# Allegro board PR1.brd
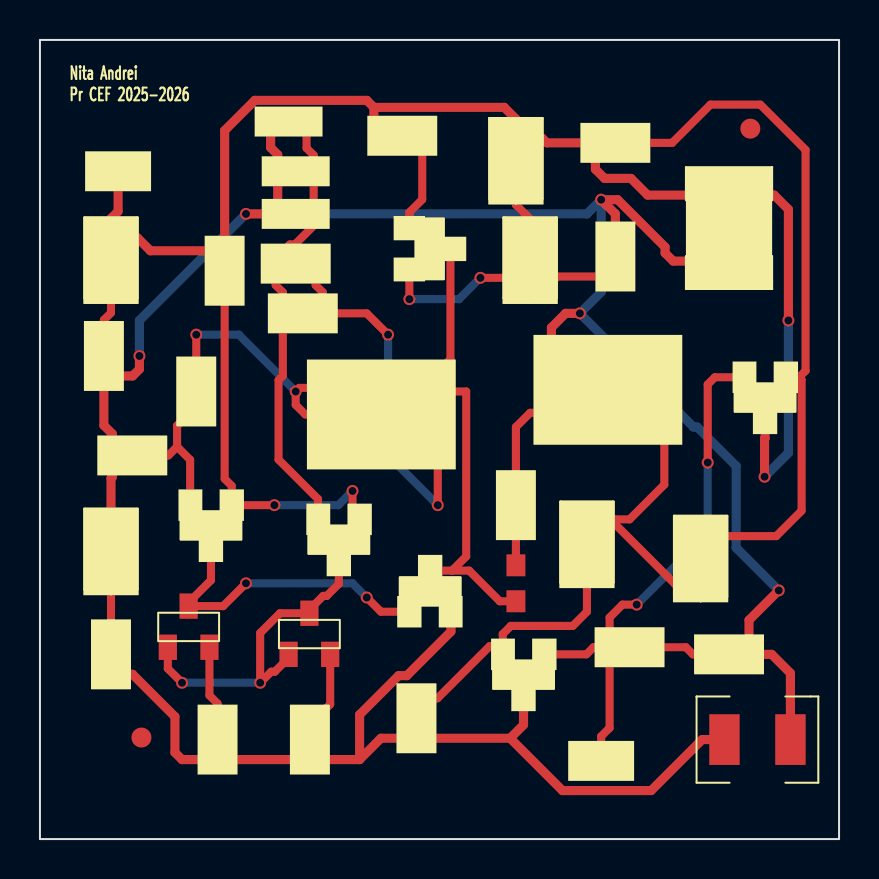
[diagram p0: board, top side]
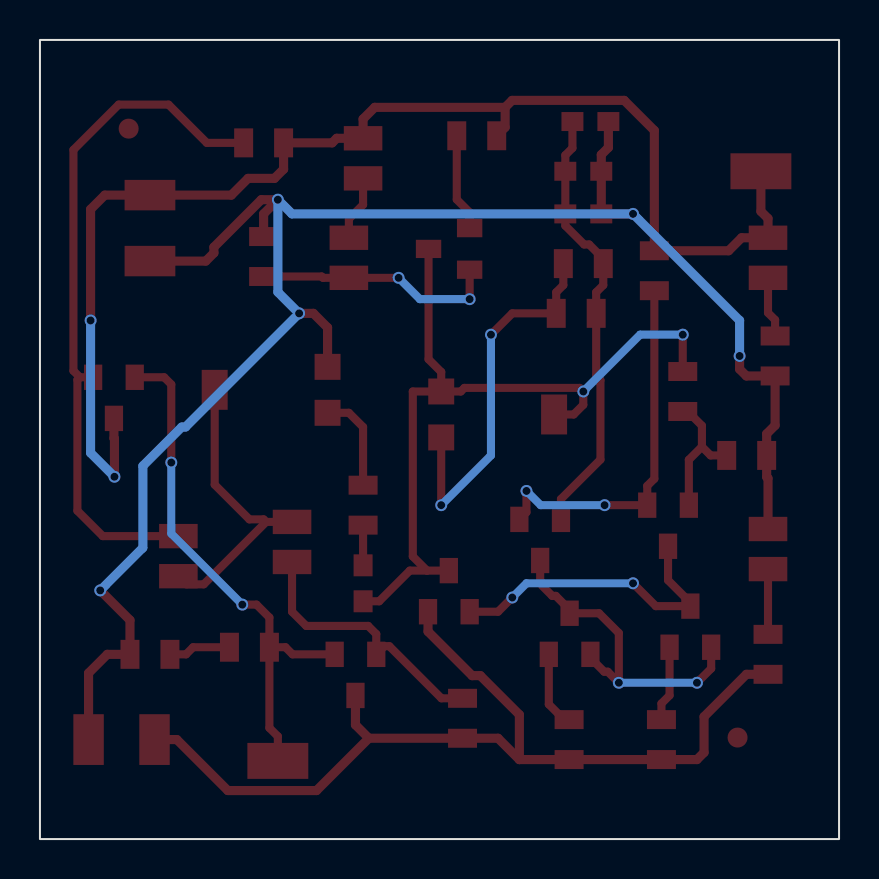
[diagram p1: board, bottom side, seen from below]

Outline 40 x 40 mm; copper layers: TOP, BOTTOM. Coordinates in mm from the lower left corner of the outline.
Outline path: rectangle 0,0 40,40

## Design rules (mm)
nets with their own width: min track width 0.406; nets N13241 N17645 N18917 N19228 N23866 N26865 N26902 N27119 N27578 N41311 N41581 N41671 N55630 N55700 N55907 N56042 N192121 N416411 N536461 N540281 N559671
nets with their own width: min track width 0.457; nets 0 N11142 N17659

## Placement (name value [footprint] x y rotation side)
C1  100p  [CAPC2008X126N_0805]  12.8 31.29 180 top
C2  1u  [CAPC2008X126N_0805]  23.83 12.8 90 top
C3  470p  [CAPC2008X126N_0805]  12.8 33.43 180 top
C4  100p  [CAPC2008X126N_0805]  12.45 35.92 180 top
D3  D1N4148  [SMD0805]  33.07 13.16 90 top
D4  D1N4148  [SMD0805]  27.38 13.87 90 top
D5  D1N4148  [SMD0805]  23.83 33.07 90 top
D6  D1N4148  [SMD0805]  24.54 28.09 90 top
J1  CON2  [1210RF_WV_12D]  34.49 30.58 270 top
J2  CON2  [1210RF_WV_12D]  35.92 4.98 0 top
LED1  MLED81  [SMD0805]  3.56 28.09 90 top
LED2  MLED81  [SMD0805]  3.56 13.51 90 top
NOREF  -  [unnamed]  5.08 5.08 0 top
NOREF#2  -  [unnamed]  35.56 35.56 0 top
P1  10k  [TS53YL]  19.91 22.4 0 top
P2  10k  [TS53YL]  25.6 21.34 180 top
Q3  QBC856B  [TO236AA]  9.6 16.71 90 top
Q4  QBC856B  [TO236AA]  16 16 90 top
Q5  QBC846B  [TO236AA]  18.49 11.38 270 top
Q8  QBC846B  [TO236AA]  6.4 9.6 270 top
Q9  QBC846B  [TO236AA]  12.45 9.25 270 top
Q10  QBC856B  [TO236AA]  25.25 9.25 90 top
Q11  QBC846B  [TO236AA]  37.34 23.11 90 top
Q12  QBC856B  [TO236AA]  18.49 30.58 180 top
R1  15k  [RES2012X50N_0805]  9.25 28.45 90 top
R4  100  [RES2012X50N_0805]  18.14 35.2 0 top
R5  10k  [RES2012X50N_0805]  13.16 26.31 0 top
R6  47k  [RES2012X50N_0805]  4.62 19.2 0 top
R8  15k  [RES2012X50N_0805]  29.51 9.6 180 top
R10  9.1k  [RES2012X50N_0805]  18.85 6.05 270 top
R11  9.1k  [RES2012X50N_0805]  28.8 34.85 0 top
R12  47k  [RES2012X50N_0805]  7.82 22.4 90 top
R13  3.9k  [RES2012X50N_0805]  23.83 16.71 90 top
R14  330  [RES2012X50N_0805]  3.2 24.18 270 top
R15  330  [RES2012X50N_0805]  3.56 9.25 90 top
R16  82k  [RES2012X50N_0805]  12.8 28.8 0 top
R17  2k  [RES2012X50N_0805]  34.49 9.25 180 top
R18  51  [RES2012X50N_0805]  13.51 4.98 90 top
R19  51  [RES2012X50N_0805]  8.89 4.98 90 top
R20  3.9k  [RES2012X50N_0805]  28.8 29.16 270 top
TP1  TEST POINT  [SMD_PAD_3-05_1-80]  28.09 3.91 0 top
TP2  TEST POINT  [SMD_PAD_3-05_1-80]  3.91 33.43 0 top

## Library data of the parts
C1-C4 = C
D3-D6 = D1N4148_0
J1 J2 = CON2
LED1 LED2 = MLED81_1
P1 P2 = POT
Q3 Q4 Q10 Q12 = QBC856B
Q5 Q8 Q9 Q11 = QBC846B_0
R1 R4-R6 R8 R10-R20 = R
TP1 TP2 = TEST POINT

## Footprints (pads in the part's own frame, mm; a bottom-side part is the same pattern mirrored in y, then rotated)
1210RF_WV_12D
  rect 1.524x2.54 smd: 1(-1.651,0) 2(1.651,0)
CAPC2008X126N_0805
  rect 1.1x0.95 smd: 1(-0.9,0) 2(0.9,0)
RES2012X50N_0805
  rect 0.95x1.45 smd: 1(-1,0) 2(1,0)
SMD0805
  rect 1.219x1.93 smd: A(2.007,0) C(0,0)
SMD_PAD_3-05_1-80
  rect 3.05x1.8 smd: 1(0,0)
TO236AA
  rect 1.27x0.914 smd: 1(0,0) 2(0,2.083) 3(-2.057,1.041)
TS53YL
  rect 1.3x1.3 smd: 1(0,0) 3(0,-2.3)
  rect 1.3x2 smd: 2(-5.65,-1.15)
unnamed
  round 1 smd: (0,0)

## Nets
0: C1.2 C3.2 C4.2 J1.2 J2.2 LED2.A P2.3 R6.1 R14.2 R17.1 R20.1
N11142: D5.A J1.1 LED1.A Q11.3 R1.2 R4.1 R11.1 TP2.1
N13241: Q3.1(E) Q4.1(E) R1.1
N17645: Q4.3 Q8.1 Q9.1 Q9.3
N17659: J2.1 Q5.2(E) Q10.3 R10.2 R15.1 R18.1 R19.1
N18917: Q3.2 R6.2 R12.1
N19228: Q10.1(E) Q11.2(E) R8.2 TP1.1
N23866: Q3.3 Q5.1 Q8.3
N26865: D3.A Q11.1 R11.2
N26902: D4.C(2) Q10.2 R10.1
N27119: C1.1 C3.1 C4.1 Q4.2 R5.1 R16.1
N27578: C2.1 P1.1 P1.2(T) Q5.3 Q12.3 R12.2
N41311: P1.3 R5.2 R16.2
N41581: D3.C(2) D4.A P2.2(T)
N41671: P2.1 R13.2
N55630: Q9.2(E) R18.2
N55700: Q8.2(E) R19.2
N55907: Q12.1(E) R4.2
N56042: D6.C(2) Q12.2 R20.2
N192121: R8.1 R17.2
N416411: C2.2 R13.1
N536461: LED1.C(2) R14.1
N540281: LED2.C(2) R15.2
N559671: D5.C(2) D6.A

## Via types
v1: diameter 0.599, hole 0.399, TOP to BOTTOM, 21 vias

## Routing (per net, layer and track width the routed paths; a pad name or vN(x,y) marks a point on that pad's centre or on a via; arc(x,y) is an arc through that point)
0: length 91.7
  TOP w0.457: J1.2 31.7,28.93 31.29,29.34 31.29,29.63 28.92,32 v1(28.09,32) 28.8,31.29 R20.1 ; v1(4.98,24.18) 4.98,23.52 4.64,23.18 R14.2 3.2,20.71 3.62,20.28 R6.1 3.62,18.12 3.56,18.05 LED2.A ; P2.3 25.6,25.6 26.31,26.31 v1(27.03,26.31) ; J2.2 37.57,8.31 36.63,9.25 R17.1 35.49,10.96 v1(36.98,12.45) ; v1(10.31,31.29) C1.2 C3.2 11.9,34.26 11.55,34.61 C4.2
  BOTTOM w0.457: v1(36.98,12.45) 34.85,14.58 34.85,18.67 32.9,20.62 32.72,20.62 v1(27.03,26.31) 28.09,27.38 v1(28.09,32) 27.38,31.29 v1(10.31,31.29) 4.98,25.96 v1(4.98,24.18)
N11142: length 66.3
  TOP w0.457: 16.71,36.63 16.71,35.63 R4.1 ; 16.71,36.63 16.37,36.97 10.75,36.97 9.25,35.47 R1.2 5.53,29.45 4.88,30.1 LED1.A 3.56,31.06 3.91,31.42 TP2.1 ; 16.71,36.63 23.24,36.63 23.83,36.04 D5.A 25.15,35.08 25.37,34.85 R11.1 27.8,33.53 28.26,33.07 29.58,33.07 30.42,32.23 J1.1 36.75,32.23 37.47,31.52 v1(37.47,25.96) ; Q11.3 36.3,20.07 36.27,20.04 v1(36.27,18.14)
  BOTTOM w0.457: v1(36.27,18.14) 37.47,19.33 v1(37.47,25.96)
N13241: length 18.8
  TOP w0.406: v1(11.73,16.71) Q3.1 9.6,17.68 9.25,18.03 R1.1 ; Q4.1 15.65,16.36 v1(15.65,17.42)
  BOTTOM w0.406: v1(15.65,17.42) 14.94,16.71 v1(11.73,16.71)
N17645: length 16.8
  TOP w0.406: Q4.3 14.96,12.78 14.36,12.17 14.18,12.17 13.49,11.48 13.49,11.3 12.01,11.3 11.02,10.31 v1(11.02,7.82) 11.58,8.38 11.76,8.38 12.45,9.07 Q9.1 ; Q8.1 6.4,8.53 v1(7.11,7.82)
  BOTTOM w0.406: v1(7.11,7.82) v1(11.02,7.82)
N17659: length 48.1
  TOP w0.457: Q5.2 20.57,10.39 18.36,8.18 17.95,8.18 16,6.23 16,3.98 ; 23.54,5.05 26.15,2.43 30.6,2.43 33.15,4.98 J2.1 ; 23.54,5.05 R10.2 17.07,5.05 16,3.98 ; 23.54,5.05 24.21,5.71 Q10.3 ; 16,3.98 R18.1 R19.1 7.11,3.98 6.76,4.33 6.76,6.13 4.64,8.25 R15.1
N18917: length 6.9
  TOP w0.406: 6.86,19.64 7.52,18.98 Q3.2 ; 6.86,19.64 6.43,19.2 R6.2 ; 6.86,19.64 6.86,20.69 7.57,21.4 R12.1
N19228: length 26.9
  TOP w0.406: Q10.1 27.35,9.25 27.71,9.6 R8.2 ; R8.2 28.51,5.56 28.09,5.14 TP1.1 ; R8.2 28.51,11.09 29.16,11.73 v1(29.87,11.73) ; v1(33.43,18.85) 33.43,22.76 33.78,23.11 Q11.2
  BOTTOM w0.406: v1(33.43,18.85) 33.43,15.29 v1(29.87,11.73)
N23866: length 15.6
  TOP w0.406: v1(10.31,12.8) 9.17,11.66 Q8.3 7.44,11.84 8.56,12.95 Q3.3 ; v1(16.36,12.09) 17.07,11.38 Q5.1
  BOTTOM w0.406: v1(16.36,12.09) 15.65,12.8 v1(10.31,12.8)
N26865: length 34.7
  TOP w0.406: R11.2 31.65,34.85 33.56,36.76 36.06,36.76 38.32,34.5 38.32,23.44 38,23.11 ; D3.A 36.86,15.16 38.13,16.43 38.13,22.99 38,23.11 ; 38,23.11 Q11.1
N26902: length 13.8
  TOP w0.406: R10.1 19.9,7.05 22.51,9.65 22.76,9.65 Q10.2 23.16,10.26 23.57,10.67 26.67,10.67 27.38,11.38 D4.C
N27119: length 22
  TOP w0.406: Q4.2 13.92,17.02 11.94,18.99 11.94,22.97 12.16,23.18 R5.1 12.16,27.37 11.8,27.73 R16.1 11.8,29.05 12.51,29.76 12.76,29.76 13.7,30.7 C1.1 C3.1 13.7,34.23 13.35,34.59 C4.1
N27578: length 40.6
  TOP w0.406: C2.1 23.02,11.9 21.49,13.44 20.62,13.44 ; P1.1 21.34,22.4 21.34,14.15 20.62,13.44 ; P1.1 18.93,22.4 18.75,22.58 12.98,22.58 v1(12.8,22.4) 12.8,21.73 13.28,21.25 P1.2 ; P1.1 19.91,23.38 20.55,24.02 Q12.3 ; 20.62,13.44 Q5.3 ; R12.2 v1(7.82,25.25)
  BOTTOM w0.406: v1(7.82,25.25) 9.96,25.25 v1(12.8,22.4)
N41311: length 19.3
  TOP w0.406: v1(19.91,16.71) P1.3 ; v1(17.42,25.25) 16.36,26.31 R5.2 14.16,27.37 13.8,27.73 R16.2
  BOTTOM w0.406: v1(19.91,16.71) 17.42,19.2 v1(17.42,25.25)
N41581: length 15.2
  TOP w0.406: P2.2 31.25,17.74 29.51,16 28.8,16 28.68,15.88 ; 28.68,15.88 31.8,12.75 32.66,12.75 D3.C ; 28.68,15.88 D4.A
N41671: length 5
  TOP w0.406: P2.1 24.54,21.34 23.83,20.62 R13.2
N55630: length 3.8
  TOP w0.406: Q9.2 14.53,6.74 13.76,5.98 R18.2
N55700: length 3.8
  TOP w0.406: Q8.2 8.48,7.19 8.89,6.78 R19.2
N55907: length 4.9
  TOP w0.406: Q12.1 18.49,31.37 19.14,32.01 R4.2
N56042: length 12.3
  TOP w0.406: Q12.2 v1(18.49,27.03) ; R20.2 25.9,28.16 25.83,28.09 D6.C v1(22.05,28.09)
  BOTTOM w0.406: v1(18.49,27.03) 20.98,27.03 v1(22.05,28.09)
N192121: length 3.1
  TOP w0.406: R17.2 32.69,9.25 32.33,9.6 R8.1
N416411: length 2
  TOP w0.406: C2.2 R13.1
N536461: length 3.1
  TOP w0.406: LED1.C 3.56,26.34 3.2,25.99 R14.1
N540281: length 3.3
  TOP w0.406: LED2.C R15.2
N559671: length 3.3
  TOP w0.406: D5.C 23.83,31.75 24.54,31.04 D6.A

## Text on the board
Ref Des/Silkscreen Top: Nita Andrei | Pr CEF 2025-2026
XSECTION_CHART: *  SURFACE | L1 TOP CONDUCTOR | *  DIELECTRIC | L2 BOTTOM CONDUCTOR | DESIGN CROSS SECTION CHART | ___________________________ | TOTAL THICKNESS 64.417 MIL | 1-2
DISPLAY_TOP: FIGURE | FINISHED_SIZE | 15.7 | DRILL CHART: TOP to BOTTOM | ALL UNITS ARE IN MILS | PLATED | QTY | 23
